# EAGLE board Tiny_UniProg (EAGLE 9.5.1)
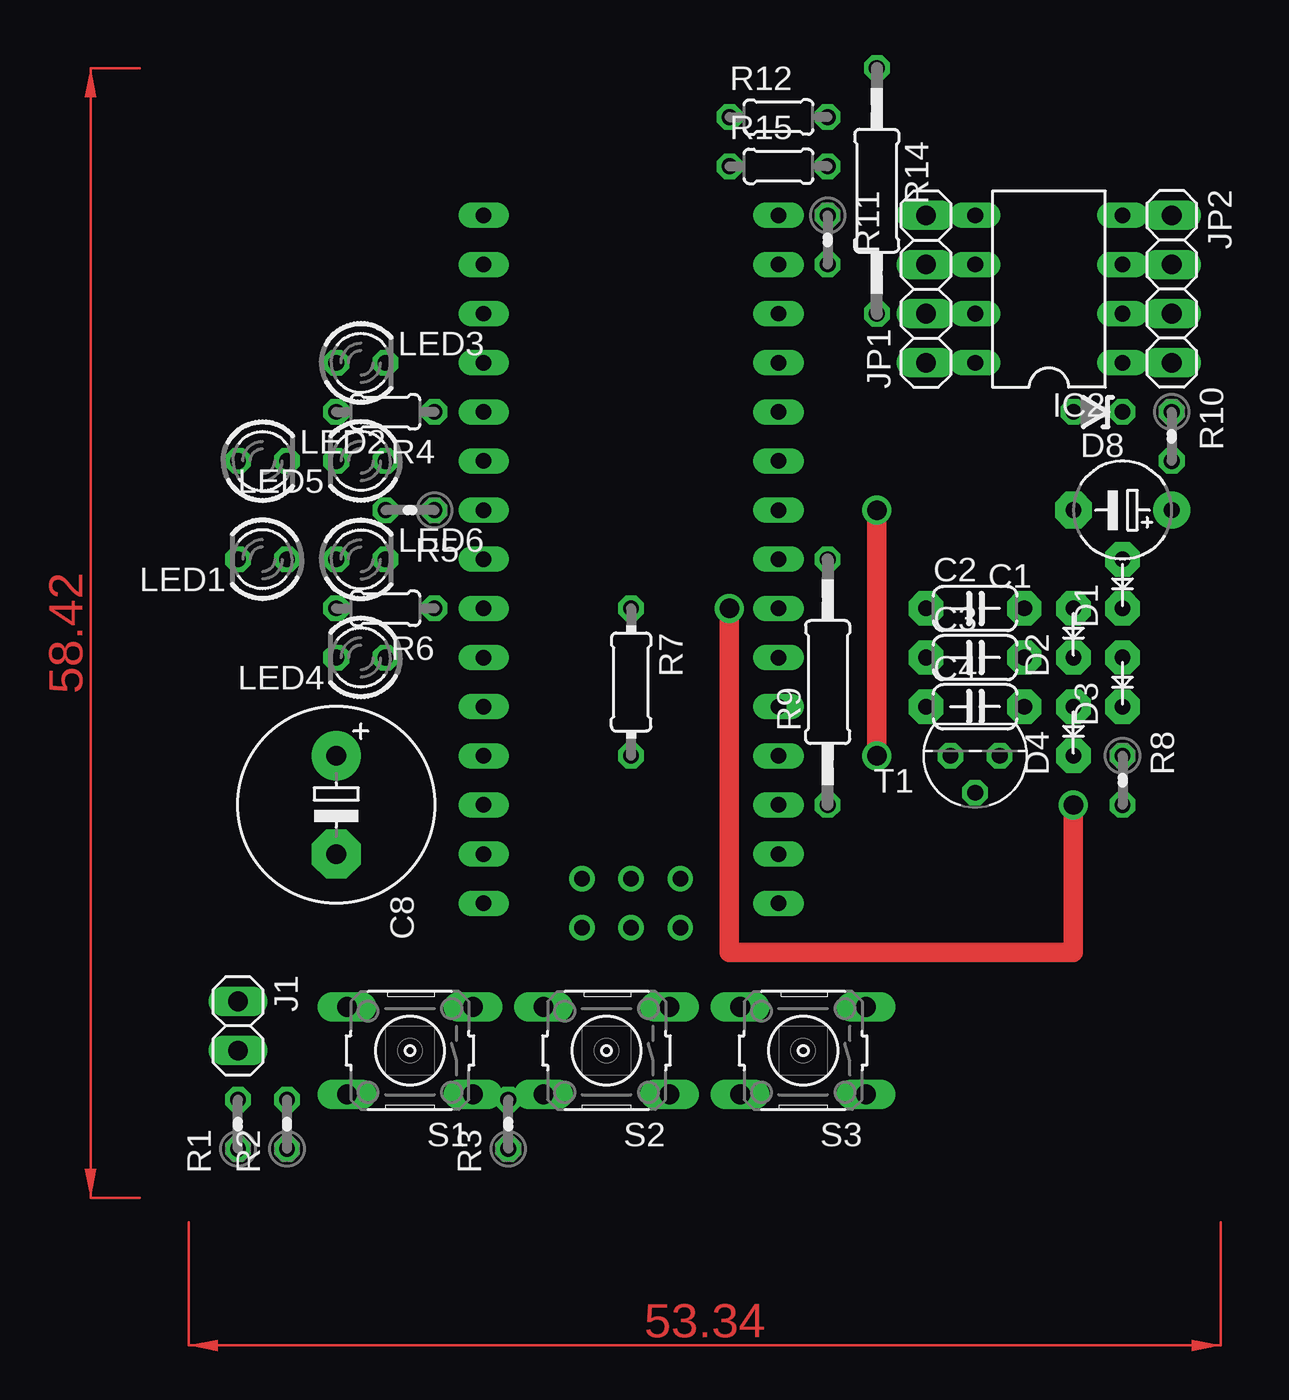
[diagram p0: board, top side]
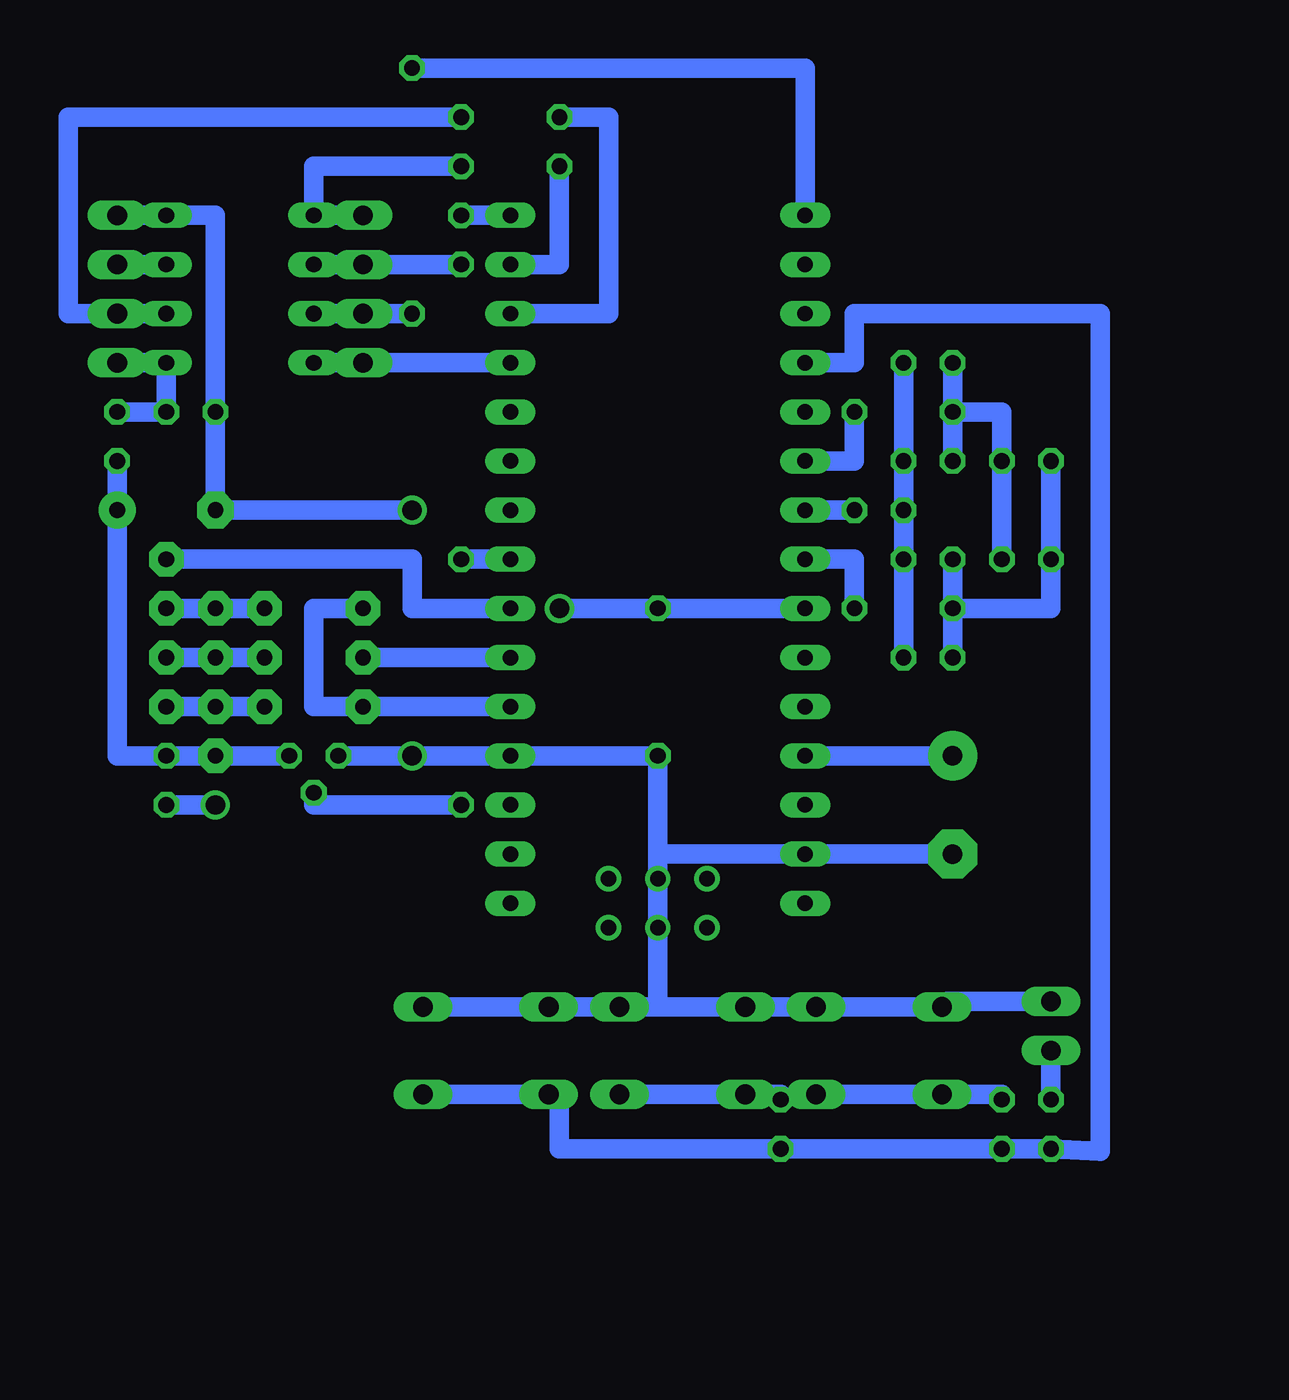
[diagram p1: board, bottom side, seen from below]

No outline drawn. Coordinates in mm, seen from the top.
Copper layers (1*16): Top 0.035mm / dielectric 1.5mm / Bottom 0.035mm
Design rules "default": minimum track width 6mil, minimum drill 0.35mm, track to track 6mil, track to pad 6mil, pad to pad 6mil, via to via 6mil, smd to smd 6mil, copper to edge 40mil, drill to drill 6mil, minimum pad ring 10mil, minimum via ring 8mil, stop-mask expansion 4mil, vias tented up to drill 0mil, thermal gap 10mil

## Footprints (pad centres in the part's own frame; a part is rotated, then mirrored left to right if it is on the bottom)
E5-5 = drill 0.813 pad 1.905: + -2.54,0 | drill 0.813 pad 1.905 octagon: - 2.54,0
C050-024X044 = drill 0.813 pad 1.778 octagon: 1 -2.54,0; 2 2.54,0
E5-10,5 = drill 1.016 pad 2.54: + -2.54,0 | drill 1.016 pad 2.54 octagon: - 2.54,0
DO35-2 = drill 0.813 pad 1.778 octagon: A 1.27,0; C -1.27,0
ZDIO-2.5 = drill 0.813 octagon: A 1.27,0; C -1.27,0
DIL08 = drill 0.813 long: 1 -3.81,-3.81; 2 -1.27,-3.81; 3 1.27,-3.81; 4 3.81,-3.81; 5 3.81,3.81; 6 1.27,3.81; 7 -1.27,3.81; 8 -3.81,3.81
1X02 = drill 1.016 long: 1 -1.27,0; 2 1.27,0
1X04 = drill 1.016 long: 1 -3.81,0; 2 -1.27,0; 3 1.27,0; 4 3.81,0
LED3MM = drill 0.813 octagon: A -1.27,0; K 1.27,0
0204V = drill 0.813 octagon: 1 -1.27,0; 2 1.27,0
0204/5 = drill 0.813 octagon: 1 -2.54,0; 2 2.54,0
0204/7 = drill 0.813 octagon: 1 -3.81,0; 2 3.81,0
0207/12 = drill 0.813 octagon: 1 -6.35,0; 2 6.35,0
B3F-10XX = drill 1.016 long: 1 -3.251,2.261; 2 3.251,2.261; 3 -3.251,-2.261; 4 3.251,-2.261
TO92 = drill 0.813 octagon: 1 1.27,0; 2 0,1.905; 3 -1.27,0
NANO = drill 0.8 long: 3.3V -10.16,24.13; 5V -10.16,-1.27; A0 -10.16,19.05; A1 -10.16,16.51; A2 -10.16,13.97; A3 -10.16,11.43; A4 -10.16,8.89; A5 -10.16,6.35; A6 -10.16,3.81; A7 -10.16,1.27; AREF -10.16,21.59; D2 5.08,1.27; D3 5.08,3.81; D4 5.08,6.35; D5 5.08,8.89; D6 5.08,11.43; D7 5.08,13.97; D8 5.08,16.51; D9 5.08,19.05; D10 5.08,21.59; D11 5.08,24.13; D12 5.08,26.67; D13 -10.16,26.67; GND -10.16,-6.35; GND1 5.08,-1.27; RAW -10.16,-8.89; RST -10.16,-3.81; RST1 5.08,-3.81; RX1 5.08,-6.35; TX0 5.08,-8.89 | drill 0.8: ICSP1 -5.08,-10.16; ICSP2 -5.08,-7.62; ICSP3 -2.54,-10.16; ICSP4 -2.54,-7.62; ICSP5 0,-10.16; ICSP6 0,-7.62

## Placement (x,y rotation side)
C1  10 uF  [E5-5]  90.17,60.96 180 top
C2  220nF  [C050-024X044]  82.55,55.88 0 top
C3  220nF  [C050-024X044]  82.55,53.34 0 top
C4  220nF  [C050-024X044]  82.55,50.8 0 top
C8  470uF  [E5-10,5]  49.53,45.72 270 top
D1  1N4148  [DO35-2]  90.17,57.15 90 top
D2  1N4148  [DO35-2]  87.63,54.61 90 top
D3  1N4148  [DO35-2]  90.17,52.07 90 top
D4  1N4148  [DO35-2]  87.63,49.53 90 top
D8  12V Opt.  [ZDIO-2.5]  88.9,66.04 180 top
IC2  ATTiny85  [DIL08]  86.36,72.39 90 top
J1  Automatic  [1X02]  44.45,34.29 270 top
JP1  [1X04]  80.01,72.39 90 top
JP2  [1X04]  92.71,72.39 270 top
LED1  Blue  [LED3MM]  45.72,58.42 180 top
LED2  White  [LED3MM]  45.72,63.5 0 top
LED3  Green  [LED3MM]  50.8,68.58 0 top
LED4  Red  [LED3MM]  50.8,53.34 180 top
LED5  Yellow  [LED3MM]  50.8,63.5 180 top
LED6  Orange  [LED3MM]  50.8,58.42 0 top
R1  47K  [0204V]  44.45,29.21 90 top
R2  10K  [0204V]  46.99,29.21 90 top
R3  2K2  [0204V]  58.42,29.21 90 top
R4  220  [0204/5]  52.07,66.04 180 top
R5  220  [0204V]  53.34,60.96 180 top
R6  220  [0204/5]  52.07,55.88 180 top
R7  100K 1%  [0204/7]  64.77,52.07 270 top
R8  470K 1%  [0204V]  90.17,46.99 270 top
R9  10K  [0207/12]  74.93,52.07 90 top
R10  1K  [0204V]  92.71,64.77 270 top
R11  1K  [0204V]  74.93,74.93 270 top
R12  1K  [0204/5]  72.39,81.28 0 top
R14  1K  [0207/12]  77.47,77.47 270 top
R15  1K  [0204/5]  72.39,78.74 0 top
S1  [B3F-10XX]  53.34,33.02 180 top
S2  [B3F-10XX]  63.5,33.02 180 top
S3  [B3F-10XX]  73.66,33.02 180 top
T1  BC547  [TO92]  82.55,48.26 180 top
U$1  NANO  [NANO]  67.31,49.53 0 top

## Library data of the parts
C1-C4 C8 = rcl; SPICEPREFIX: C
D1-D4 D8 = diode
IC2 = ic-package
J1 JP1 JP2 = pinhead
LED1-LED6 = led
R1-R12 R14 R15 = rcl; SPICEPREFIX: R
S1-S3 = switch-omron; MPN: B3F-1000; OC_FARNELL: 176432; OC_NEWARK: 36M3542
T1 = transistor
U$1 = Arduino-clone

## Nets
+5V: C8.+ U$1.5V
A0: R1.1 R2.1 R3.1 S3.1 S3.2 U$1.A0
A2: R4.1 U$1.A2
A3: R5.1 U$1.A3
A4: R6.1 U$1.A4
AD_12V: R7.1 R8.2 U$1.A5
CLK_TY: IC2.7 JP1.2 R14.2
CLK_U: R14.1 U$1.D13
CLKI_TY: IC2.2 JP2.3 R12.2
CLKI_U: R12.1 U$1.D10
CP_GND: R9.2 U$1.D5
CP_PWR: D1.A U$1.D4
GND: C1.- C8.- D8.A IC2.4 J1.1 JP2.1 R7.2 S1.3 S1.4 S2.3 S2.4 S3.3 S3.4 T1.1 U$1.GND U$1.GND1
MISO_TY: IC2.6 JP1.3 R11.2
MISO_U: R11.1 U$1.D12
MOSI_TY: IC2.5 JP1.4 R15.2
MOSI_U: R15.1 U$1.D11
N$1: C2.2 D1.C D2.A
N$2: C3.2 D2.C D3.A
N$3: C4.2 D3.C D4.A
N$4: IC2.3 JP2.2
N$7: R9.1 T1.2
N$9: C1.+ D4.C R8.1 R10.2 T1.3
N$28: J1.2 R1.2
N$33: R3.2 S2.1 S2.2
N$34: LED1.A LED2.K LED3.A LED5.K R4.2
N$42: LED3.K LED4.A LED5.A LED6.K R5.2
N$44: LED1.K LED2.A LED4.K LED6.A R6.2
N$67: R2.2 S1.1 S1.2
P1: C2.1 C4.1 U$1.D2
P2: C3.1 U$1.D3
PWR_U: IC2.8 JP1.1 U$1.D9
RST_TY: D8.C IC2.1 JP2.4 R10.1

## Tracks (layer width: path | path; a pad name or v marks a point on that pad's centre or on a via)
+5V
  Bottom 1.016: C8.+ U$1.5V
A0
  Bottom 1.016: S3.1 S3.2 70.13,30.76 69.85,30.48 69.85,27.94 R3.1 R2.1 R1.1 41.91,27.81 41.91,71.12 54.61,71.12 54.61,68.58 U$1.A0
A2
  Bottom 1.016: U$1.A2 54.61,63.5 R4.1
A3
  Bottom 1.016: R5.1 U$1.A3
A4
  Bottom 1.016: U$1.A4 54.61,58.42 R6.1
AD_12V  (via drill 1)
  Top 1.016: v87.63,45.72 87.63,38.1 69.85,38.1 v69.85,55.88
  Bottom 1.016: U$1.A5 R7.1 v69.85,55.88 | R8.2 v87.63,45.72
CLK_TY
  Bottom 1.016: JP1.2 IC2.7 R14.2
CLK_U
  Bottom 1.016: R14.1 57.15,83.82 U$1.D13
CLKI_TY
  Bottom 1.016: R12.2 95.25,81.28 95.25,71.12 IC2.2 JP2.3
CLKI_U
  Bottom 1.016: R12.1 67.31,81.28 67.31,71.12 U$1.D10
CP_GND
  Bottom 1.016: U$1.D5 R9.2
CP_PWR
  Bottom 1.016: U$1.D4 77.47,55.88 77.47,58.42 D1.A
GND  (via drill 1)
  Top 1.016: v77.47,60.96 v77.47,48.26
  Bottom 1.016: S3.3 S3.4 S2.3 64.77,35.28 | 64.77,35.28 S2.4 S1.3 S1.4 49.81,35.56 J1.1 | 64.77,43.18 U$1.GND C8.- | 64.77,43.18 R7.2 U$1.GND1 v77.47,48.26 T1.1 | 64.77,43.18 64.77,35.28 | JP2.1 IC2.4 87.63,76.2 D8.A C1.- v77.47,60.96
MISO_TY
  Bottom 1.016: R11.2 IC2.6 JP1.3
MISO_U
  Bottom 1.016: U$1.D12 R11.1
MOSI_TY
  Bottom 1.016: R15.2 82.55,78.74 IC2.5 JP1.4
MOSI_U
  Bottom 1.016: U$1.D11 69.85,73.66 R15.1
N$1
  Bottom 1.016: D2.A D1.C C2.2
N$2
  Bottom 1.016: D3.A D2.C C3.2
N$3
  Bottom 1.016: C4.2 D3.C D4.A
N$4
  Bottom 1.016: IC2.3 JP2.2
N$7
  Bottom 1.016: T1.2 82.55,45.72 R9.1
N$9
  Bottom 1.016: T1.3 D4.C R8.1 92.71,48.26 C1.+ R10.2
N$28
  Bottom 1.016: J1.2 R1.2
N$33
  Bottom 1.016: S2.1 S2.2 58.42,30.76 R3.2
N$34
  Bottom 1.016: R4.2 LED5.K | LED2.K LED1.A 46.99,66.04 R4.2 | R4.2 LED3.A
N$42
  Bottom 1.016: LED4.A LED6.K LED5.A | LED3.K LED5.A | R5.2 LED5.A
N$44
  Bottom 1.016: R6.2 LED4.K | LED1.K LED2.A 44.45,55.88 R6.2 | R6.2 LED6.A
N$67
  Bottom 1.016: S1.1 S1.2 46.99,30.76 R2.2
P1
  Bottom 1.016: U$1.D2 C4.1 82.55,50.8 82.55,55.88 C2.1
P2
  Bottom 1.016: U$1.D3 C3.1
PWR_U
  Bottom 1.016: U$1.D9 JP1.1 IC2.8
RST_TY
  Bottom 1.016: R10.1 D8.C IC2.1 JP2.4
(copper drawn outside any net)
  shapes: Top area x2